# EAGLE board CT_schematic (EAGLE 7.6.0)

Size 100 x 80 mm. Coordinates in mm from the lower left corner, seen from the top.
Outline: 0,0 100,0 100,80 0,80 0,0
Copper layers (1*16): Top 0.035mm / dielectric 1.5mm / Bottom 0.035mm
Design rules "default": minimum track width 10mil, minimum drill 24mil, track to track 8mil, track to pad 8mil, pad to pad 8mil, via to via 8mil, smd to smd 8mil, copper to edge 40mil, drill to drill 8mil, minimum pad ring 10mil, minimum via ring 8mil, stop-mask expansion 4mil, vias tented up to drill 0mil, thermal gap 10mil

## Footprints (pad centres in the part's own frame; a part is rotated, then mirrored left to right if it is on the bottom)
C0603 = smd 0.8 x 0.8: 1 -0.762,0; 2 0.762,0
C0402 = smd 0.5 x 0.5: 1 -0.508,0; 2 0.508,0
R0603 = smd 0.8 x 0.8: 1 -0.762,0; 2 0.762,0
C0805 = smd 1.2 x 1.3: 1 -1.016,0; 2 1.016,0
C1210 = smd 1.2 x 2.5: 1 -1.524,0; 2 1.524,0
C1206 = smd 1.3 x 1.6: 1 -1.524,0; 2 1.524,0
EXV-9H = smd 3.505 x 1.676: 1 -2.857,0; 2 2.857,0
L0603 = smd 0.8 x 0.8: 1 -0.762,0; 2 0.762,0
DR1040 = smd 1.6 x 3.2: 1 -4.458,0; 2 4.458,0
PJ-037B_PACKAGE = drill 3.7 square: 1 12,0 | drill 3.2 square: 2 6,0
LQFP176 = smd 0.3 x 1.2: 1 -10.75,-12.75; 2 -10.25,-12.75; 3 -9.75,-12.75; 4 -9.25,-12.75; 5 -8.75,-12.75; 6 -8.25,-12.75; 7 -7.75,-12.75; 8 -7.25,-12.75; 9 -6.75,-12.75; 10 -6.25,-12.75; 11 -5.75,-12.75; 12 -5.25,-12.75; 13 -4.75,-12.75; 14 -4.25,-12.75; 15 -3.75,-12.75; 16 -3.25,-12.75; 17 -2.75,-12.75; 18 -2.25,-12.75; 19 -1.75,-12.75; 20 -1.25,-12.75; 21 -0.75,-12.75; 22 -0.25,-12.75; 23 0.25,-12.75; 24 0.75,-12.75; 25 1.25,-12.75; 26 1.75,-12.75; 27 2.25,-12.75; 28 2.75,-12.75; 29 3.25,-12.75; 30 3.75,-12.75; 31 4.25,-12.75; 32 4.75,-12.75; 33 5.25,-12.75; 34 5.75,-12.75; 35 6.25,-12.75; 36 6.75,-12.75; 37 7.25,-12.75; 38 7.75,-12.75; 39 8.25,-12.75; 40 8.75,-12.75; 41 9.25,-12.75; 42 9.75,-12.75; 43 10.25,-12.75; 44 10.75,-12.75; 89 10.75,12.75; 90 10.25,12.75; 91 9.75,12.75; 92 9.25,12.75; 93 8.75,12.75; 94 8.25,12.75; 95 7.75,12.75; 96 7.25,12.75; 97 6.75,12.75; 98 6.25,12.75; 99 5.75,12.75; 100 5.25,12.75; 101 4.75,12.75; 102 4.25,12.75; 103 3.75,12.75; 104 3.25,12.75; 105 2.75,12.75; 106 2.25,12.75; 107 1.75,12.75; 108 1.25,12.75; 109 0.75,12.75; 110 0.25,12.75; 111 -0.25,12.75; 112 -0.75,12.75; 113 -1.25,12.75; 114 -1.75,12.75; 115 -2.25,12.75; 116 -2.75,12.75; 117 -3.25,12.75; 118 -3.75,12.75; 119 -4.25,12.75; 120 -4.75,12.75; 121 -5.25,12.75; 122 -5.75,12.75; 123 -6.25,12.75; 124 -6.75,12.75; 125 -7.25,12.75; 126 -7.75,12.75; 127 -8.25,12.75; 128 -8.75,12.75; 129 -9.25,12.75; 130 -9.75,12.75; 131 -10.25,12.75; 132 -10.75,12.75 | smd 1.2 x 0.3: 45 12.75,-10.75; 46 12.75,-10.25; 47 12.75,-9.75; 48 12.75,-9.25; 49 12.75,-8.75; 50 12.75,-8.25; 51 12.75,-7.75; 52 12.75,-7.25; 53 12.75,-6.75; 54 12.75,-6.25; 55 12.75,-5.75; 56 12.75,-5.25; 57 12.75,-4.75; 58 12.75,-4.25; 59 12.75,-3.75; 60 12.75,-3.25; 61 12.75,-2.75; 62 12.75,-2.25; 63 12.75,-1.75; 64 12.75,-1.25; 65 12.75,-0.75; 66 12.75,-0.25; 67 12.75,0.25; 68 12.75,0.75; 69 12.75,1.25; 70 12.75,1.75; 71 12.75,2.25; 72 12.75,2.75; 73 12.75,3.25; 74 12.75,3.75; 75 12.75,4.25; 76 12.75,4.75; 77 12.75,5.25; 78 12.75,5.75; 79 12.75,6.25; 80 12.75,6.75; 81 12.75,7.25; 82 12.75,7.75; 83 12.75,8.25; 84 12.75,8.75; 85 12.75,9.25; 86 12.75,9.75; 87 12.75,10.25; 88 12.75,10.75; 133 -12.75,10.75; 134 -12.75,10.25; 135 -12.75,9.75; 136 -12.75,9.25; 137 -12.75,8.75; 138 -12.75,8.25; 139 -12.75,7.75; 140 -12.75,7.25; 141 -12.75,6.75; 142 -12.75,6.25; 143 -12.75,5.75; 144 -12.75,5.25; 145 -12.75,4.75; 146 -12.75,4.25; 147 -12.75,3.75; 148 -12.75,3.25; 149 -12.75,2.75; 150 -12.75,2.25; 151 -12.75,1.75; 152 -12.75,1.25; 153 -12.75,0.75; 154 -12.75,0.25; 155 -12.75,-0.25; 156 -12.75,-0.75; 157 -12.75,-1.25; 158 -12.75,-1.75; 159 -12.75,-2.25; 160 -12.75,-2.75; 161 -12.75,-3.25; 162 -12.75,-3.75; 163 -12.75,-4.25; 164 -12.75,-4.75; 165 -12.75,-5.25; 166 -12.75,-5.75; 167 -12.75,-6.25; 168 -12.75,-6.75; 169 -12.75,-7.25; 170 -12.75,-7.75; 171 -12.75,-8.25; 172 -12.75,-8.75; 173 -12.75,-9.25; 174 -12.75,-9.75; 175 -12.75,-10.25; 176 -12.75,-10.75
ARDUCAM = drill 1 pad 1.8 square: 1 0,0 | drill 1 pad 1.8: 2 0,2.54; 3 2.54,0; 4 2.54,2.54; 5 5.08,0; 6 5.08,2.54; 7 7.62,0; 8 7.62,2.54; 9 10.16,0; 10 10.16,2.54; 11 12.7,0; 12 12.7,2.54; 13 15.24,0; 14 15.24,2.54; 15 17.78,0; 16 17.78,2.54; 17 20.32,0; 18 20.32,2.54; 19 22.86,0; 20 22.86,2.54
TDFN-8/6MM = smd 0.3 x 0.75: 1 0,0; 2 0.5,0; 3 1,0; 4 1.5,0; 5 1.5,3; 6 1,3; 7 0.5,3; 8 0,3
LBGA-64 = smd 0.559 x 0.559: A1 -3.5,3.5; A2 -2.5,3.5; A3 -1.5,3.5; A4 -0.5,3.5; A5 0.5,3.5; A6 1.5,3.5; A7 2.5,3.5; A8 3.5,3.5; B1 -3.5,2.5; B2 -2.5,2.5; B3 -1.5,2.5; B4 -0.5,2.5; B5 0.5,2.5; B6 1.5,2.5; B7 2.5,2.5; B8 3.5,2.5; C1 -3.5,1.5; C2 -2.5,1.5; C3 -1.5,1.5; C4 -0.5,1.5; C5 0.5,1.5; C6 1.5,1.5; C7 2.5,1.5; C8 3.5,1.5; D1 -3.5,0.5; D2 -2.5,0.5; D3 -1.5,0.5; D4 -0.5,0.5; D5 0.5,0.5; D6 1.5,0.5; D7 2.5,0.5; D8 3.5,0.5; E1 -3.5,-0.5; E2 -2.5,-0.5; E3 -1.5,-0.5; E4 -0.5,-0.5; E5 0.5,-0.5; E6 1.5,-0.5; E7 2.5,-0.5; E8 3.5,-0.5; F1 -3.5,-1.5; F2 -2.5,-1.5; F3 -1.5,-1.5; F4 -0.5,-1.5; F5 0.5,-1.5; F6 1.5,-1.5; F7 2.5,-1.5; F8 3.5,-1.5; G1 -3.5,-2.5; G2 -2.5,-2.5; G3 -1.5,-2.5; G4 -0.5,-2.5; G5 0.5,-2.5; G6 1.5,-2.5; G7 2.5,-2.5; G8 3.5,-2.5; H1 -3.5,-3.5; H2 -2.5,-3.5; H3 -1.5,-3.5; H4 -0.5,-3.5; H5 0.5,-3.5; H6 1.5,-3.5; H7 2.5,-3.5; H8 3.5,-3.5
QFN-24 = smd 0.7 x 0.305: 1 -1.815,1.25; 2 -1.815,0.75; 3 -1.815,0.25; 4 -1.815,-0.25; 5 -1.815,-0.73; 6 -1.815,-1.25; 13 1.815,-1.25; 14 1.815,-0.75; 15 1.815,-0.25; 16 1.815,0.25; 17 1.815,0.75; 18 1.815,1.25 | smd 0.305 x 0.7: 7 -1.25,-1.815; 8 -0.75,-1.815; 9 -0.25,-1.815; 10 0.25,-1.815; 11 0.75,-1.815; 12 1.25,-1.815; 19 1.25,1.815; 20 0.75,1.815; 21 0.25,1.815; 22 -0.25,1.815; 23 -0.75,1.815; 24 -1.25,1.815 | smd 2.591 x 2.591: 25 0,0
FCI_10118193-0001LF = smd 0.4 x 1.35: 1 -1.3,2.675; 2 -0.65,2.675; 3 0,2.675; 4 0.65,2.675; 5 1.3,2.675 | smd 1.6 x 1.4: 6 -3.2,2.45; 7 3.2,2.45 | smd 1.9 x 1.9: 8 -1.2,0; 9 1.2,0 | hole 0.5: -3.3,0; 3.3,0
SOT143B = smd 1 x 0.7: 1 -0.75,-1 | smd 0.6 x 0.7: 2 0.95,-1; 3 0.95,1; 4 -0.95,1
ABS07-32.768KHZ-7-T = smd 1.1 x 2.4: 1 -2.5,0; 2 0,0
ABLS-25.000MHZ-B2F-T = smd 5.6 x 2.8: 1 -3.81,0; 2 5.69,0
ASFL1 = smd 1.7 x 1.5: 1 -1.27,-1.1; 2 1.27,-1.1; 3 1.27,1.1; 4 -1.27,1.1
WSON-8 = smd 0.3 x 0.6: 1 -0.75,0; 2 0.05,0; 3 0.85,0; 4 1.65,0; 5 1.65,3.8; 6 0.85,3.8; 7 0.05,3.8; 8 -0.75,3.8 | smd 3 x 2.6: PAD 0.45,1.9
HTSSOP14 = smd 1.676 x 0.356: 1 -2.8,1.95; 2 -2.8,1.3; 3 -2.8,0.65; 4 -2.8,0; 5 -2.8,-0.65; 6 -2.8,-1.3; 7 -2.8,-1.95; 8 2.8,-1.95; 9 2.8,-1.3; 10 2.8,-0.65; 11 2.8,0; 12 2.8,0.65; 13 2.8,1.3; 14 2.8,1.95 | smd 3 x 5: 15 0,0 | drill 0.4 pad 0.45: P$1 -0.75,1.5; P$2 0.75,1.5; P$3 -0.75,0; P$4 0.8,0; P$5 -0.75,-1.5; P$6 0.9,-1.5
SON-6 = smd 0.55 x 0.3: 1 -0.355,0.5 | smd 0.52 x 0.3: 2 -0.37,0; 3 -0.37,-0.5; 4 0.37,-0.5; 5 0.37,0; 6 0.37,0.5
SW_4-1437565-2 = smd 1.4 x 2.1: 1 -2.23,4.55; 2 -2.23,-4.55; 3 2.23,4.55; 4 2.23,-4.55
LGM67K-G1J2-24-Z = smd 0.8 x 1.4: A -2,0; C 0,0
NC7SZ125M5X = smd 1.3 x 0.7: 1 -1.3,0.95; 2 -1.3,0; 3 -1.3,-0.95; 4 1.3,-0.95; 5 1.3,0.95
DUMMY_PACKAGE_227 = drill 0.3: 1 0,-1; 2 1.5,-1; 3 3,-1

## Placement (x,y rotation side)
C1  1e-06  [C0603]  -69.85,73.66 0 top  (outside the outline)
C2  1e-07  [C0603]  -73.66,73.66 0 top  (outside the outline)
C3  1e-07  [C0603]  -77.47,73.66 0 top  (outside the outline)
C4  1e-07  [C0603]  -81.28,73.66 0 top  (outside the outline)
C5  1e-07  [C0603]  -15.24,78.74 0 top  (outside the outline)
C6  1e-07  [C0603]  -19.05,78.74 0 top  (outside the outline)
C7  1e-07  [C0603]  -22.86,78.74 0 top  (outside the outline)
C8  1e-07  [C0603]  -26.67,78.74 0 top  (outside the outline)
C9  1e-07  [C0603]  -30.48,78.74 0 top  (outside the outline)
C10  1e-07  [C0603]  -34.29,78.74 0 top  (outside the outline)
C11  1e-07  [C0603]  -38.1,78.74 0 top  (outside the outline)
C12  1e-07  [C0603]  -41.91,78.74 0 top  (outside the outline)
C13  1e-07  [C0603]  -45.72,78.74 0 top  (outside the outline)
C14  1e-07  [C0603]  -49.53,78.74 0 top  (outside the outline)
C15  1e-07  [C0603]  -53.34,78.74 0 top  (outside the outline)
C16  1e-07  [C0603]  -57.15,78.74 0 top  (outside the outline)
C17  1e-07  [C0603]  -60.96,78.74 0 top  (outside the outline)
C18  4.7e-06  [C0603]  -54.61,73.66 0 top  (outside the outline)
C19  1e-08  [C0603]  -64.77,78.74 0 top  (outside the outline)
C20  1e-06  [C0603]  -68.58,78.74 0 top  (outside the outline)
C21  1e-07  [C0603]  -72.39,78.74 0 top  (outside the outline)
C22  2.2e-06  [C0603]  -58.42,73.66 0 top  (outside the outline)
C23  2.2e-06  [C0603]  -62.23,73.66 0 top  (outside the outline)
C24  1e-11  [C0402]  -66.04,83.82 0 top  (outside the outline)
C25  1e-11  [C0402]  -69.85,83.82 0 top  (outside the outline)
C26  1e-11  [C0402]  -73.66,83.82 0 top  (outside the outline)
C27  1e-11  [C0402]  -77.47,83.82 0 top  (outside the outline)
C28  1e-06  [C0603]  -76.2,78.74 0 top  (outside the outline)
C29  1e-08  [C0402]  -81.28,83.82 0 top  (outside the outline)
C30  1e-08  [C0402]  -15.24,88.9 0 top  (outside the outline)
C31  1e-08  [C0402]  -19.05,88.9 0 top  (outside the outline)
C32  1e-08  [C0402]  -22.86,88.9 0 top  (outside the outline)
C33  2.2e-06  [C0603]  -66.04,73.66 0 top  (outside the outline)
C34  1e-08  [C0402]  -26.67,88.9 0 top  (outside the outline)
C35  1e-08  [C0402]  -30.48,88.9 0 top  (outside the outline)
C36  1e-06  [C0603]  -80.01,78.74 0 top  (outside the outline)
C37  1e-08  [C0402]  -34.29,88.9 0 top  (outside the outline)
C38  1e-08  [C0402]  -38.1,88.9 0 top  (outside the outline)
C39  8e-07  [R0603]  -15.24,83.82 0 top  (outside the outline)
C40  1e-05  [C0805]  -27.94,67.31 0 top  (outside the outline)
C41  1e-06  [C0603]  -19.05,83.82 0 top  (outside the outline)
C42  3.3e-09  [C0402]  -62.23,83.82 0 top  (outside the outline)
C43  1e-07  [C0402]  -41.91,88.9 0 top  (outside the outline)
C44  2.2e-05  [C1210]  -45.72,60.96 0 top  (outside the outline)
C45  2.2e-05  [C1210]  -52.07,60.96 0 top  (outside the outline)
C46  1e-05  [C1206]  -58.42,60.96 0 top  (outside the outline)
C47  1e-05  [C1206]  -64.77,60.96 0 top  (outside the outline)
C48  1e-07  [C0402]  -45.72,88.9 0 top  (outside the outline)
C49  0.0001  [EXV-9H]  -62.23,44.45 0 top  (outside the outline)
C50  0.0001  [EXV-9H]  -73.66,44.45 0 top  (outside the outline)
C51  1e-08  [C0402]  -49.53,88.9 0 top  (outside the outline)
C52  1e-08  [C0402]  -53.34,88.9 0 top  (outside the outline)
C53  1e-08  [C0402]  -57.15,88.9 0 top  (outside the outline)
C54  1e-08  [C0402]  -60.96,88.9 0 top  (outside the outline)
F1  240.0  [L0603]  -22.86,83.82 0 top  (outside the outline)
I1  7e-06  [DR1040]  -38.1,33.02 0 top  (outside the outline)
J1  PJ-037B  [PJ-037B_PACKAGE]  -69.85,7.62 0 top  (outside the outline)
R2  1000.0  [R0603]  -26.67,83.82 0 top  (outside the outline)
R7  4700.0  [R0603]  -30.48,83.82 0 top  (outside the outline)
R8  4700.0  [R0603]  -34.29,83.82 0 top  (outside the outline)
R9  4700.0  [R0603]  -38.1,83.82 0 top  (outside the outline)
R10  4700.0  [R0603]  -41.91,83.82 0 top  (outside the outline)
R11  2200.0  [R0603]  -45.72,83.82 0 top  (outside the outline)
R13  2200.0  [R0603]  -49.53,83.82 0 top  (outside the outline)
R15  10000.0  [R0603]  -62.23,67.31 0 top  (outside the outline)
R16  10000.0  [R0603]  -67.31,67.31 0 top  (outside the outline)
R17  10000.0  [R0603]  -72.39,67.31 0 top  (outside the outline)
R18  10000.0  [R0603]  -77.47,67.31 0 top  (outside the outline)
R19  10000.0  [R0603]  -15.24,73.66 0 top  (outside the outline)
R20  10000.0  [R0603]  -20.32,73.66 0 top  (outside the outline)
R21  10000.0  [R0603]  -25.4,73.66 0 top  (outside the outline)
R22  10000.0  [R0603]  -30.48,73.66 0 top  (outside the outline)
R23  8060.0  [R0603]  -53.34,83.82 0 top  (outside the outline)
R24  100000.0  [R0603]  -41.91,67.31 0 top  (outside the outline)
R25  36000.0  [R0603]  -35.56,73.66 0 top  (outside the outline)
R26  100000.0  [R0603]  -46.99,67.31 0 top  (outside the outline)
R27  71007.101651032  [R0603]  -36.83,67.31 0 top  (outside the outline)
R28  22000.0  [R0603]  -40.64,73.66 0 top  (outside the outline)
R29  10000.0  [R0603]  -45.72,73.66 0 top  (outside the outline)
R30  10000.0  [R0603]  -50.8,73.66 0 top  (outside the outline)
R31  9100.0  [R0603]  -57.15,83.82 0 top  (outside the outline)
R32  680000.0  [R0603]  -52.07,67.31 0 top  (outside the outline)
R33  120000.0  [R0603]  -57.15,67.31 0 top  (outside the outline)
U1  STM32F745IGT6  [LQFP176]  -26.67,13.97 0 top  (outside the outline)
U2  arducam_ov2640  [ARDUCAM]  -81.28,52.07 0 top  (outside the outline)
U3  24AA01T-I/MNY  [TDFN-8/6MM]  -54.61,31.75 0 top  (outside the outline)
U4  mt28ew512aba1HPC-0AAT  [LBGA-64]  -46.99,7.62 0 top  (outside the outline)
U5  USB3317C-CP-TR  [QFN-24]  -38.1,60.96 0 top  (outside the outline)
U6  10118193-0001LF  [FCI_10118193-0001LF]  -52.07,44.45 0 top  (outside the outline)
U7  prtr5v0u2ax  [SOT143B]  -73.66,88.9 0 top  (outside the outline)
U8  ABS07-32.768KHZ-7-T  [ABS07-32.768KHZ-7-T]  -49.53,53.34 0 top  (outside the outline)
U9  ABLS-25.000MHZ-B2F-T  [ABLS-25.000MHZ-B2F-T]  -26.67,53.34 0 top  (outside the outline)
U10  ASFL1-25MHZ-NCS  [ASFL1]  -26.67,44.45 0 top  (outside the outline)
U11  ASFL1-26MHZ-NCS  [ASFL1]  -43.18,44.45 0 top  (outside the outline)
U12  LP2951ACSDX/NOPB  [WSON-8]  -73.66,30.48 0 top  (outside the outline)
U13  tps54225PWP  [HTSSOP14]  -17.78,60.96 0 top  (outside the outline)
U14  TPS3895ADRYR  [SON-6]  -13.97,92.71 0 top  (outside the outline)
U15  4-1437565-2  [SW_4-1437565-2]  -27.94,34.29 0 top  (outside the outline)
U16  Q65110A2395  [LGM67K-G1J2-24-Z]  -26.67,60.96 0 top  (outside the outline)
U17  nc7sz125m5x  [NC7SZ125M5X]  -69.85,59.69 0 top  (outside the outline)
U18  nc7sz125m5x  [NC7SZ125M5X]  -76.2,59.69 0 top  (outside the outline)
U19  nc7sz125m5x  [NC7SZ125M5X]  -15.24,67.31 0 top  (outside the outline)
U20  nc7sz125m5x  [NC7SZ125M5X]  -21.59,67.31 0 top  (outside the outline)
U21  Dummy  [DUMMY_PACKAGE_227]  -80.01,88.9 0 top  (outside the outline)

## Library data of the parts
C1-C54 F1 I1 J1 R2 R7-R11 R13 R15-R33 U1-U21 = circuit_tree

## Nets
CLK_CRYSTAL_U1_9: C24.1 U1.9 U8.1
CLK_CRYSTAL_U1_10: C25.1 U1.10 U8.2
CLK_CRYSTAL_U1_29: C26.1 U1.29 U9.1
CLK_CRYSTAL_U1_30: C27.1 U1.30 U9.2
CLK_U2_8: U2.8 U10.3
CLK_U5_23: U5.23 U11.3
GND: C1.2 C2.2 C3.2 C4.2 C5.2 C6.2 C7.2 C8.2 C9.2 C10.2 C11.2 C12.2 C13.2 C14.2 C15.2 C16.2 C17.2 C18.2 C19.2 C20.2 C21.2 C22.2 C23.2 C24.2 C25.2 C26.2 C27.2 C28.2 C29.2 C30.2 C31.2 C32.2 C33.2 C34.2 C35.2 C36.2 C37.2 C38.2 C39.2 C40.2 C41.2 C42.2 C44.2 C45.2 C46.2 C47.2 C48.2 C49.2 C50.2 C51.2 C52.2 C53.2 C54.2 J1.2 R2.2 R15.2 R17.2 R23.2 R26.2 R28.2 R31.2 R33.2 U1.14 U1.22 U1.37 U1.61 U1.71 U1.90 U1.102 U1.113 U1.126 U1.135 U1.148 U1.158 U2.2 U2.20 U3.4 U3.7 U4.E8 U4.H2 U4.H7 U5.25 U6.5 U6.6 U6.7 U6.8 U6.9 U7.1 U10.2 U11.2 U12.3 U12.4 U12.PAD U13.5 U13.8 U13.9 U13.15 U14.2 U16.C U17.1 U17.3 U18.1 U18.3 U19.1 U19.3 U20.1 U20.3 U21.1
NET_U1_31: R8.1 U1.31 U18.4
NET_U1_39: C19.1 C20.1 F1.1 U1.38 U1.39
NET_U1_48: R17.1 U1.48
NET_U1_81: C22.1 U1.81
NET_U1_125: C23.1 U1.125
NET_U1_164: R11.1 U1.164 U3.6
NET_U1_165: R13.1 U1.165 U3.5
NET_U1_166: R15.1 U1.166
NET_U1_171: R16.1 U1.171
NET_U1_175: U16.A
NET_U1_176: U15.3 U15.4
NET_U2_19: R9.1 U2.19 U19.4
NET_U4_B4: R21.1 U4.B4
NET_U4_B5: R7.1 U4.B5 U17.4
NET_U5_4: C33.1 U5.4
NET_U5_22: R10.1 U5.22 U20.4
NET_U5_24: R23.1 U5.24
NET_U6_1: C36.1 U5.2 U6.1 U7.4
NET_U6_2: U5.5 U6.2 U7.3
NET_U6_3: U5.6 U6.3 U7.2
NET_U12_5: R24.1 U12.5
NET_U12_7: R25.2 R26.1 U12.7
NET_U13_2: R27.2 R28.1 U13.2
NET_U13_3: C41.1 U13.3
NET_U13_4: C42.1 U13.4
NET_U13_10: C43.1 I1.1 U13.10 U13.11
NET_U13_12: C43.2 U13.12
NET_U14_1: R30.1 R31.1 U14.1
NET_U14_3: R32.2 R33.1 U14.3
NET_U14_4: R29.1 U14.4 U17.2 U18.2 U19.2 U20.2
NET_U15_1: R2.1 U15.1 U15.2
PROC_DCMI_D0: U1.86 U2.18
PROC_DCMI_D1: U1.87 U2.17
PROC_DCMI_D2: U1.88 U2.16
PROC_DCMI_D3: U1.89 U2.15
PROC_DCMI_D4: U1.129 U2.14
PROC_DCMI_D5: U1.145 U2.13
PROC_DCMI_D6: U1.167 U2.12
PROC_DCMI_D7: U1.168 U2.11
PROC_DCMI_D8: U1.83 U2.10
PROC_DCMI_D9: U1.84 U2.9
PROC_DCMI_HSYNC: U1.50 U2.6
PROC_DCMI_PIXCLK: U1.52 U2.7
PROC_DCMI_VSYNC: U1.152 U2.5
PROC_FMC_A0: U1.16 U4.E2
PROC_FMC_A1: U1.17 U4.D2
PROC_FMC_A2: U1.18 U4.C2
PROC_FMC_A3: U1.19 U4.A2
PROC_FMC_A4: U1.20 U4.B2
PROC_FMC_A5: U1.21 U4.D3
PROC_FMC_A6: U1.60 U4.C3
PROC_FMC_A9: U1.65 U4.A6
PROC_FMC_A10: U1.66 U4.C6
PROC_FMC_A11: U1.67 U4.D6
PROC_FMC_A12: U1.106 U4.B7
PROC_FMC_A13: U1.107 U4.A7
PROC_FMC_A14: U1.108 U4.C7
PROC_FMC_A15: U1.109 U4.D7
PROC_FMC_A16: U1.99 U4.E7
PROC_FMC_A17: U1.100 U4.B3
PROC_FMC_A18: U1.101 U4.C4
PROC_FMC_A19: U1.2 U4.D5
PROC_FMC_A20: U1.3 U4.D4
PROC_FMC_A21: U1.4 U4.C5
PROC_FMC_A22: U1.5 U4.B8
PROC_FMC_A23: U1.1 U4.C8
PROC_FMC_A24: U1.156 U4.F8
PROC_FMC_D0: U1.104 U4.E3
PROC_FMC_D1: U1.105 U4.H3
PROC_FMC_D2: U1.142 U4.E4
PROC_FMC_D3: U1.143 U4.H4
PROC_FMC_D4: U1.68 U4.H5
PROC_FMC_D5: U1.69 U4.E5
PROC_FMC_D6: U1.70 U4.H6
PROC_FMC_D7: U1.73 U4.E6
PROC_FMC_D8: U1.74 U4.F3
PROC_FMC_D9: U1.75 U4.G3
PROC_FMC_D10: U1.76 U4.F4
PROC_FMC_D11: U1.77 U4.G4
PROC_FMC_D12: U1.78 U4.F5
PROC_FMC_D13: U1.96 U4.G6
PROC_FMC_D14: U1.97 U4.F6
PROC_FMC_D15: U1.98 U4.G7
PROC_FMC_NBL0: R22.1 U1.169 U4.F7
PROC_FMC_NE2: R18.1 U1.155 U4.F2
PROC_FMC_NOE: R19.1 U1.146 U4.G2
PROC_FMC_NWAIT: U1.150 U4.A4
PROC_FMC_NWE: R20.1 U1.147 U4.A5
PROC_PC13: U1.8 U21.3
PROC_PI8: U1.7 U21.2
PROC_USB_OTG_HS_ULPI_CK: U5.12
PROC_USB_OTG_HS_ULPI_D0: U5.16
PROC_USB_OTG_HS_ULPI_D1: U5.15
PROC_USB_OTG_HS_ULPI_D2: U5.14
PROC_USB_OTG_HS_ULPI_D3: U5.13
PROC_USB_OTG_HS_ULPI_D4: U5.11
PROC_USB_OTG_HS_ULPI_D5: U5.10
PROC_USB_OTG_HS_ULPI_D6: U5.9
PROC_USB_OTG_HS_ULPI_D7: U5.8
PROC_USB_OTG_HS_ULPI_DIR: U5.19
PROC_USB_OTG_HS_ULPI_NXT: U5.18
PROC_USB_OTG_HS_ULPI_STP: U5.20
VCC_S1_12V0: C39.1 C46.1 C47.1 C49.1 C50.1 J1.1 U12.8 U13.7 U13.13 U13.14
VCC_TIER1_1V8: C35.1 C40.1 C51.1 C52.1 C53.1 C54.1 R24.2 R25.1 U5.21 U12.1 U17.5 U18.5 U19.5 U20.5
VCC_TIER1_3V3: C1.1 C2.1 C3.1 C4.1 C5.1 C6.1 C7.1 C8.1 C9.1 C10.1 C11.1 C12.1 C13.1 C14.1 C15.1 C16.1 C17.1 C18.1 C21.1 C28.1 C29.1 C30.1 C31.1 C32.1 C34.1 C37.1 C38.1 C44.1 C45.1 C48.1 F1.2 I1.2 R7.2 R8.2 R9.2 R10.2 R11.2 R13.2 R16.2 R18.2 R19.2 R20.2 R21.2 R22.2 R27.1 R29.2 R30.2 R32.1 U1.6 U1.15 U1.23 U1.36 U1.49 U1.62 U1.72 U1.82 U1.91 U1.103 U1.114 U1.127 U1.136 U1.149 U1.159 U1.172 U2.1 U3.8 U4.D8 U4.F1 U4.G5 U5.3 U5.17 U10.4 U11.4 U13.1 U14.6

## Tracks (layer width: path | path; a pad name or v marks a point on that pad's centre or on a via)
CLK_CRYSTAL_U1_9  (2 unrouted)
CLK_CRYSTAL_U1_10  (2 unrouted)
CLK_CRYSTAL_U1_29  (2 unrouted)
CLK_CRYSTAL_U1_30  (2 unrouted)
CLK_U2_8  (1 unrouted)
CLK_U5_23  (1 unrouted)
GND  (107 unrouted)
NET_U1_31  (2 unrouted)
NET_U1_39  (4 unrouted)
NET_U1_48  (1 unrouted)
NET_U1_81  (1 unrouted)
NET_U1_125  (1 unrouted)
NET_U1_164  (2 unrouted)
NET_U1_165  (2 unrouted)
NET_U1_166  (1 unrouted)
NET_U1_171  (1 unrouted)
NET_U1_176  (1 unrouted)
NET_U2_19  (2 unrouted)
NET_U4_B4  (1 unrouted)
NET_U4_B5  (2 unrouted)
NET_U5_4  (1 unrouted)
NET_U5_22  (2 unrouted)
NET_U5_24  (1 unrouted)
NET_U6_1  (3 unrouted)
NET_U6_2  (2 unrouted)
NET_U6_3  (2 unrouted)
NET_U12_5  (1 unrouted)
NET_U12_7  (2 unrouted)
NET_U13_2  (2 unrouted)
NET_U13_3  (1 unrouted)
NET_U13_4  (1 unrouted)
NET_U13_10  (3 unrouted)
NET_U13_12  (1 unrouted)
NET_U14_1  (2 unrouted)
NET_U14_3  (2 unrouted)
NET_U14_4  (5 unrouted)
NET_U15_1  (2 unrouted)
PROC_DCMI_D0  (1 unrouted)
PROC_DCMI_D1  (1 unrouted)
PROC_DCMI_D2  (1 unrouted)
PROC_DCMI_D3  (1 unrouted)
PROC_DCMI_D4  (1 unrouted)
PROC_DCMI_D5  (1 unrouted)
PROC_DCMI_D6  (1 unrouted)
PROC_DCMI_D7  (1 unrouted)
PROC_DCMI_D8  (1 unrouted)
PROC_DCMI_D9  (1 unrouted)
PROC_DCMI_HSYNC  (1 unrouted)
PROC_DCMI_PIXCLK  (1 unrouted)
PROC_DCMI_VSYNC  (1 unrouted)
PROC_FMC_A0  (1 unrouted)
PROC_FMC_A1  (1 unrouted)
PROC_FMC_A2  (1 unrouted)
PROC_FMC_A3  (1 unrouted)
PROC_FMC_A4  (1 unrouted)
PROC_FMC_A5  (1 unrouted)
PROC_FMC_A6  (1 unrouted)
PROC_FMC_A9  (1 unrouted)
PROC_FMC_A10  (1 unrouted)
PROC_FMC_A11  (1 unrouted)
PROC_FMC_A12  (1 unrouted)
PROC_FMC_A13  (1 unrouted)
PROC_FMC_A14  (1 unrouted)
PROC_FMC_A15  (1 unrouted)
PROC_FMC_A16  (1 unrouted)
PROC_FMC_A17  (1 unrouted)
PROC_FMC_A18  (1 unrouted)
PROC_FMC_A19  (1 unrouted)
PROC_FMC_A20  (1 unrouted)
PROC_FMC_A21  (1 unrouted)
PROC_FMC_A22  (1 unrouted)
PROC_FMC_A23  (1 unrouted)
PROC_FMC_A24  (1 unrouted)
PROC_FMC_D0  (1 unrouted)
PROC_FMC_D1  (1 unrouted)
PROC_FMC_D2  (1 unrouted)
PROC_FMC_D3  (1 unrouted)
PROC_FMC_D4  (1 unrouted)
PROC_FMC_D5  (1 unrouted)
PROC_FMC_D6  (1 unrouted)
PROC_FMC_D7  (1 unrouted)
PROC_FMC_D8  (1 unrouted)
PROC_FMC_D9  (1 unrouted)
PROC_FMC_D10  (1 unrouted)
PROC_FMC_D11  (1 unrouted)
PROC_FMC_D12  (1 unrouted)
PROC_FMC_D13  (1 unrouted)
PROC_FMC_D14  (1 unrouted)
PROC_FMC_D15  (1 unrouted)
PROC_FMC_NBL0  (2 unrouted)
PROC_FMC_NE2  (2 unrouted)
PROC_FMC_NOE  (2 unrouted)
PROC_FMC_NWAIT  (1 unrouted)
PROC_FMC_NWE  (2 unrouted)
PROC_PC13  (1 unrouted)
PROC_PI8  (1 unrouted)
VCC_S1_12V0  (9 unrouted)
VCC_TIER1_1V8  (13 unrouted)
VCC_TIER1_3V3  (74 unrouted)